# EAGLE board RHD2132_headstage_accel (EAGLE 6.2)
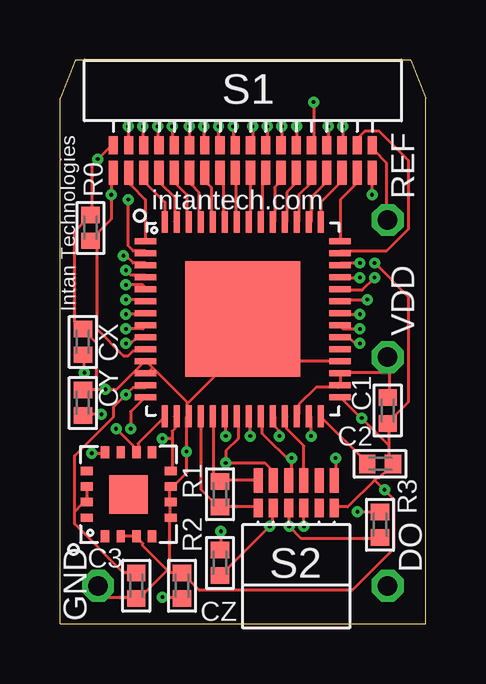
[diagram p0: board, top side]
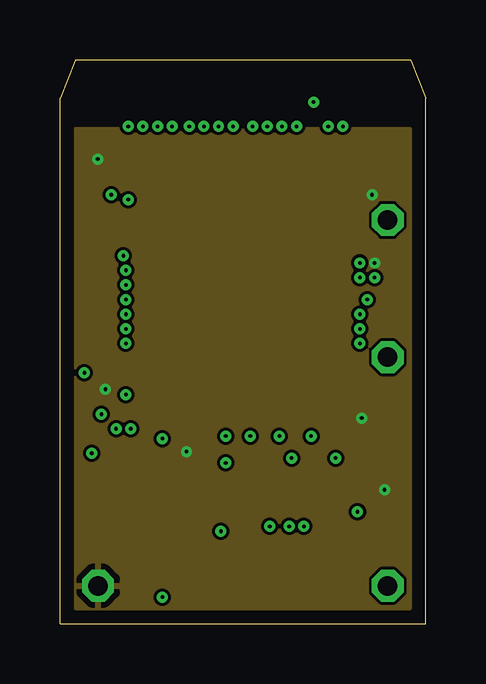
[diagram p1: board, inner layer Route2]
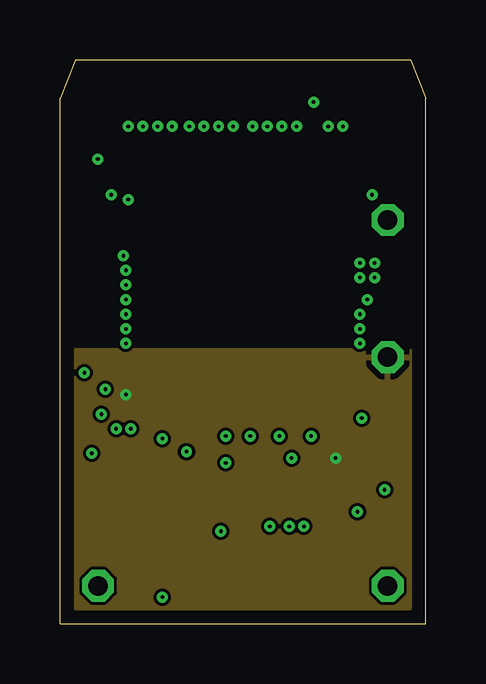
[diagram p2: board, inner layer Route3]
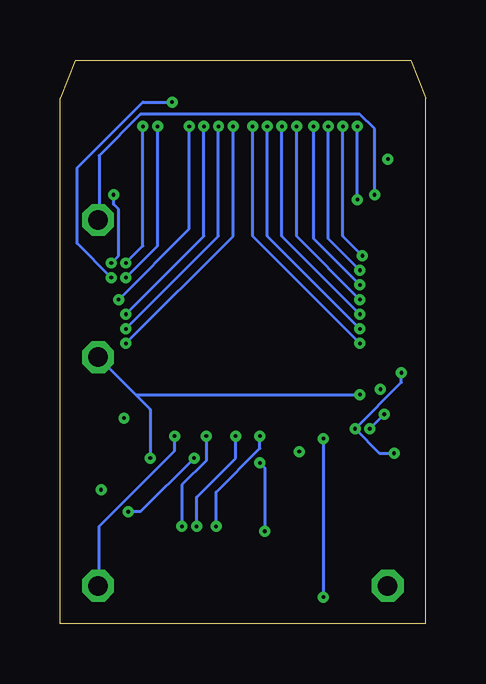
[diagram p3: board, bottom side, seen from below]

Size 15.24 x 23.5 mm. Coordinates in mm from the lower left corner, seen from the top.
Outline: 0,0 0,21.91 0.64,23.5 14.61,23.5 15.24,21.91 15.24,0 0,0
Copper layers (1*2+3*16): Top 0.035mm / dielectric 1.5mm / Route2 0.035mm / dielectric 0.15mm / Route3 0.035mm / dielectric 0.2mm / Bottom 0.035mm
Design rules: minimum track width 5mil, minimum drill 6mil, track to track 5mil, track to pad 5mil, pad to pad 5mil, via to via 5mil, smd to smd 5mil, copper to edge 15mil, drill to drill 15mil, minimum pad ring 10mil, minimum via ring 6mil, stop-mask expansion 4mil, vias tented up to drill 0mil, thermal gap 10mil
Net classes: 1 thick: width 1.016 mm; 2 power: width 0.61 mm

## Footprints (pad centres in the part's own frame; a part is rotated, then mirrored left to right if it is on the bottom)
0402 = smd 0.686 x 0.762: 1 -0.533,0; 2 0.533,0
TESTPOINT_SMALL = drill 0.813 octagon: 1 0,0
OMNETICS_A79025 = smd 0.381 x 0.762: B1 -5.397,-1.016; B2 -4.763,-1.016; B3 -4.128,-1.016; B4 -3.493,-1.016; B5 -2.857,-1.016; B6 -2.223,-1.016; B7 -1.587,-1.016; B8 -0.953,-1.016; B9 -0.318,-1.016; B10 0.318,-1.016; B11 0.953,-1.016; B12 1.587,-1.016; B13 2.223,-1.016; B14 2.857,-1.016; B15 3.493,-1.016; B16 4.128,-1.016; B17 4.763,-1.016; B18 5.397,-1.016 | smd 0.381 x 1.016: T1 -5.397,-2.159; T2 -4.763,-2.159; T3 -4.128,-2.159; T4 -3.493,-2.159; T5 -2.857,-2.159; T6 -2.223,-2.159; T7 -1.587,-2.159; T8 -0.953,-2.159; T9 -0.318,-2.159; T10 0.318,-2.159; T11 0.953,-2.159; T12 1.587,-2.159; T13 2.223,-2.159; T14 2.857,-2.159; T15 3.493,-2.159; T16 4.128,-2.159; T17 4.763,-2.159; T18 5.397,-2.159
OMNETICS_PZN-12-AA = smd 0.381 x 0.762: B1 1.587,-1.016; B2 0.953,-1.016; B3 0.318,-1.016; B4 -0.318,-1.016; B5 -0.953,-1.016; B6 -1.587,-1.016 | smd 0.381 x 1.016: T1 1.587,-2.159; T2 0.953,-2.159; T3 0.318,-2.159; T4 -0.318,-2.159; T5 -0.953,-2.159; T6 -1.587,-2.159
QFN56_8_X_8_LARGE = smd 0.9 x 0.25: 1 -4.05,3.25; 2 -4.05,2.75; 3 -4.05,2.25; 4 -4.05,1.75; 5 -4.05,1.25; 6 -4.05,0.75; 7 -4.05,0.25; 8 -4.05,-0.25; 9 -4.05,-0.75; 10 -4.05,-1.25; 11 -4.05,-1.75; 12 -4.05,-2.25; 13 -4.05,-2.75; 14 -4.05,-3.25; 29 4.05,-3.25; 30 4.05,-2.75; 31 4.05,-2.25; 32 4.05,-1.75; 33 4.05,-1.25; 34 4.05,-0.75; 35 4.05,-0.25; 36 4.05,0.25; 37 4.05,0.75; 38 4.05,1.25; 39 4.05,1.75; 40 4.05,2.25; 41 4.05,2.75; 42 4.05,3.25 | smd 0.25 x 0.9: 15 -3.25,-4.05; 16 -2.75,-4.05; 17 -2.25,-4.05; 18 -1.75,-4.05; 19 -1.25,-4.05; 20 -0.75,-4.05; 21 -0.25,-4.05; 22 0.25,-4.05; 23 0.75,-4.05; 24 1.25,-4.05; 25 1.75,-4.05; 26 2.25,-4.05; 27 2.75,-4.05; 28 3.25,-4.05; 43 3.25,4.05; 44 2.75,4.05; 45 2.25,4.05; 46 1.75,4.05; 47 1.25,4.05; 48 0.75,4.05; 49 0.25,4.05; 50 -0.25,4.05; 51 -0.75,4.05; 52 -1.25,4.05; 53 -1.75,4.05; 54 -2.25,4.05; 55 -2.75,4.05; 56 -3.25,4.05 | smd 4.8 x 4.8: CENTER 0,0
ADXL335 = smd 0.5 x 0.35: 1 -1.75,0.975; 2 -1.75,0.325; 3 -1.75,-0.325; 4 -1.75,-0.975; 9 1.75,-0.975; 10 1.75,-0.325; 11 1.75,0.325; 12 1.75,0.975 | smd 0.35 x 0.5: 5 -0.975,-1.75; 6 -0.325,-1.75; 7 0.325,-1.75; 8 0.975,-1.75; 13 0.975,1.75; 14 0.325,1.75; 15 -0.325,1.75; 16 -0.975,1.75 | smd 1.6 x 1.6: CENTER 0,0

## Placement (x,y rotation side)
C1  100n  [0402]  13.65,8.89 270 top
C2  10n  [0402]  13.34,6.67 0 top
C3  100n  [0402]  3.17,1.59 270 top
CX  27n  [0402]  0.95,11.75 90 top
CY  27n  [0402]  0.95,9.21 90 top
CZ  27n  [0402]  5.08,1.59 90 top
DO  TESTPOINT_SMALL  [TESTPOINT_SMALL]  13.65,1.59 0 top
GND  TESTPOINT_SMALL  [TESTPOINT_SMALL]  1.59,1.59 0 top
R0  0  [0402]  1.27,16.5 270 top
R1  100  [0402]  6.67,5.4 90 top
R2  100  [0402]  6.67,2.54 90 top
R3  100  [0402]  13.34,4.13 90 top
REF  TESTPOINT_SMALL  [TESTPOINT_SMALL]  13.65,16.83 90 top
S1  OMNETICS_A79025  [OMNETICS_A79025]  7.62,20.95 0 top
S2  RHD2000-CABLE-AMP-SIDE  [OMNETICS_PZN-12-AA]  9.84,3.81 180 top
U1  RHD2132_QFN  [QFN56_8_X_8_LARGE]  7.62,12.7 0 top
U2  ADXL335  [ADXL335]  2.86,5.4 90 top
VDD  TESTPOINT_SMALL  [TESTPOINT_SMALL]  13.65,11.11 0 top

## Library data of the parts
C1-C3 CX CY CZ DO GND R0 R1-R3 REF VDD = RHD2000_eval_board
S1 S2 U1 = RHD2000
U2 = harrison

## Nets
GND: C1.2 C2.2 C3.2 CX.2 CY.2 CZ.2 GND.1 R0.1 S1.B1 S1.T18 S2.B6 U1.11 U1.12 U1.17 U1.29 U1.32 U1.CENTER U2.2 U2.3 U2.5 U2.6 U2.7
N$1: R0.2 REF.1 S1.B18 S1.T1 U1.10
N$2: S1.B3 U1.3
N$3: S1.B2 U1.2
N$4: S1.B4 U1.4
N$5: S1.B5 U1.5
N$6: S1.B6 U1.6
N$7: S1.B7 U1.7
N$8: S1.B8 U1.8
N$9: S1.B9 U1.9
N$10: S1.B10 U1.34
N$11: R1.1 S2.B1 U1.18
N$12: S1.B17 U1.41
N$13: S1.B16 U1.40
N$14: S1.B15 U1.39
N$15: S1.B14 U1.38
N$16: S1.B13 U1.37
N$17: S1.B12 U1.36
N$18: S1.B11 U1.35
N$19: S1.T9 U1.50
N$20: S1.T8 U1.51
N$21: S1.T7 U1.52
N$22: S1.T3 U1.56
N$23: S1.T4 U1.55
N$24: S1.T5 U1.54
N$25: S1.T6 U1.53
N$26: S1.T10 U1.49
N$27: S1.T11 U1.48
N$28: S1.T12 U1.47
N$29: S1.T13 U1.46
N$30: S1.T14 U1.45
N$31: S1.T15 U1.44
N$32: S1.T16 U1.43
N$33: S1.T2 U1.1
N$34: S1.T17 U1.42
N$35: R1.2 S2.T1 U1.19
N$36: R2.1 S2.B2 U1.20
N$37: R2.2 S2.T2 U1.21
N$38: R3.1 S2.B3 U1.22
N$39: R3.2 S2.T3 U1.23
N$40: S2.B4 U1.24
N$41: S2.T4 U1.25
N$42: C2.1 U1.28
N$43: DO.1 U1.27
VCC: C1.1 C3.1 S2.T6 U1.13 U1.26 U1.30 U1.31 U2.14 U2.15 VDD.1
XOUT: CX.1 U1.14 U2.12
YOUT: CY.1 U1.15 U2.10
ZOUT: CZ.1 U1.16 U2.8

## Tracks (layer width: path | path; a pad name or v marks a point on that pad's centre or on a via)
GND  (via drill 0.15)
  Top 0.127: 8.23,12.09 9.35,10.97 11.58,10.97 U1.32 | S1.B1 2.13,19.91 1.32,19.1 1.32,17.07 R0.1 1.22,16.97 0.61,16.36 0.61,12.6 0.91,12.29 CX.2 1.02,12.19 1.52,11.68 1.52,9.75 | 1.52,9.75 2.34,9.75 3.56,10.97 U1.11 3.66,10.87 3.86,10.67 | 1.52,9.75 1.02,9.75 CY.2 | 5.28,9.14 5.28,9.25 3.86,10.67 | 5.28,9.14 5.28,8.74 U1.17 5.28,8.64 5.28,6.3 4.67,5.69 U2.7 4.57,5.69 4.57,5.08 U2.6 4.57,4.98 4.57,4.47 U2.5 4.57,4.37 4.57,2.13 | 3.86,10.67 3.66,10.46 U1.12 | 5.28,9.14 8.23,12.09 | 8.23,12.09 U1.CENTER | 13.11,5.99 13.21,6.1 13.31,6.1 13.72,6.5 | 13.11,5.99 11.99,4.88 11.48,4.88 S2.B6 | 13.72,6.5 13.82,6.6 C2.2 13.72,6.5 | 13.72,6.5 13.72,7.42 | 13.72,7.42 13.72,8.33 C1.2 13.72,8.43 14.53,9.25 14.53,13.61 v13.11,15.04 | 13.72,7.42 11.68,9.45 U1.29 | U2.2 3.15,3.66 U2.3 3.25,3.56 3.45,3.35 3.45,3.25 4.47,2.23 | 4.57,2.13 4.47,2.23 | 5.08,2.13 4.57,2.13 | GND.1 1.63,1.52 2.03,1.12 3.15,1.12 C3.2 3.25,1.02 4.47,2.23 | 13.11,5.99 13.92,5.18 13.92,3.15 12.19,1.42 5.79,1.42 5.08,2.13 | 5.08,2.13 CZ.2 | v13.01,17.88 13.01,18.8 S1.T18
  Bottom 0.127: v13.01,17.88 13.01,17.48 12.8,17.27 12.8,15.34 v13.11,15.04
  other vias: 12.57,8.57 13.53,5.59 5.27,7.18 1.57,19.37 1.89,9.78
  pour Route2: 0.64,0.64 14.61,0.64 14.61,20.64 0.64,20.64
N$1  (via drill 0.15)
  Top 0.127: S1.B18 13.11,19.91 13.11,19.71 13.61,19.2 13.61,16.87 REF.1 | 1.52,16.26 2.13,16.87 v2.13,17.88 2.13,18.8 S1.T1 | 1.52,16.26 1.32,16.05 R0.2 1.52,16.26 | 1.52,16.26 1.52,12.29 2.64,11.18 2.85,11.18 3.05,11.38 3.56,11.38 U1.10
  Bottom 0.127: v2.13,17.88 2.13,20.62 2.74,21.23 11.89,21.23 13.61,19.51 13.61,16.87 REF.1
N$2  (via drill 0.15)
  Top 0.127: v3.45,20.73 3.45,20.02 S1.B3 | v2.64,15.34 2.74,15.34 3.05,15.04 3.56,15.04 U1.3
  Bottom 0.127: v3.45,20.73 3.45,16.15 v2.64,15.34
N$3  (via drill 0.15)
  Top 0.127: v2.85,20.73 2.85,20.02 S1.B2 | v2.85,17.68 2.85,15.75 3.05,15.54 3.56,15.54 U1.2
  Bottom 0.127: v2.85,17.68 v2.85,20.73
N$4  (via drill 0.15)
  Top 0.127: v4.06,20.73 4.06,20.02 S1.B4 | v2.74,14.73 2.95,14.53 3.56,14.53 U1.4
  Bottom 0.127: v4.06,20.73 4.06,16.05 v2.74,14.73
N$5  (via drill 0.15)
  Top 0.127: v4.67,20.73 4.67,20.02 S1.B5 | v2.74,14.12 3.45,14.12 3.56,14.02 U1.5
  Bottom 0.127: v4.67,20.73 4.67,16.05 v2.74,14.12
N$6  (via drill 0.15)
  Top 0.127: v5.38,20.73 5.38,20.02 S1.B6 | v2.74,13.51 3.56,13.51 U1.6
  Bottom 0.127: v5.38,20.73 5.38,16.15 v2.74,13.51
N$7  (via drill 0.15)
  Top 0.127: v5.99,20.73 5.99,20.02 S1.B7 | v2.74,12.9 3.56,12.9 U1.7
  Bottom 0.127: v5.99,20.73 5.99,16.15 v2.74,12.9
N$8  (via drill 0.15)
  Top 0.127: v6.6,20.73 6.6,20.02 S1.B8 | v2.74,12.29 3.45,12.29 3.56,12.39 U1.8
  Bottom 0.127: v6.6,20.73 6.6,16.15 v2.74,12.29
N$9  (via drill 0.15)
  Top 0.127: v7.21,20.73 7.21,20.02 S1.B9 | v2.74,11.68 2.95,11.68 3.15,11.89 3.56,11.89 U1.9
  Bottom 0.127: v7.21,20.73 7.21,16.15 v2.74,11.68
N$10  (via drill 0.15)
  Top 0.127: v8.03,20.73 8.03,20.02 S1.B10 | v12.5,11.68 12.29,11.68 12.09,11.89 11.68,11.89 U1.34
  Bottom 0.127: v8.03,20.73 8.03,16.15 v12.5,11.68
N$11
  Top 0.127: S2.B1 8.23,4.88 6.71,4.88 R1.1 6.6,4.88 5.89,5.59 5.89,8.64 U1.18
N$12
  Top 0.127: S1.B17 12.39,20.02 12.39,20.22 12.7,20.52 13.31,20.52 14.53,19.3 14.53,16.46 13.61,15.54 11.68,15.54 U1.41
N$13  (via drill 0.15)
  Top 0.127: v11.79,20.73 11.79,20.02 S1.B16 | v12.5,15.04 11.68,15.04 U1.40
  Bottom 0.127: v11.79,20.73 11.79,15.75 v12.5,15.04
N$14  (via drill 0.15)
  Top 0.127: v11.18,20.73 11.18,20.02 S1.B15 | v12.5,14.43 11.68,14.43 U1.39
  Bottom 0.127: v11.18,20.73 11.18,15.75 v12.5,14.43
N$15  (via drill 0.15)
  Top 0.127: v10.57,21.74 10.57,20.02 S1.B14 | v13.11,14.43 12.6,13.92 11.68,13.92 U1.38
  Bottom 0.127: v10.57,21.74 11.79,21.74 14.53,19 14.53,15.85 v13.11,14.43
N$16  (via drill 0.15)
  Top 0.127: v9.86,20.73 9.86,20.02 S1.B13 | v12.8,13.51 11.68,13.51 U1.37
  Bottom 0.127: v9.86,20.73 9.86,16.46 v12.8,13.51
N$17  (via drill 0.15)
  Top 0.127: v9.25,20.73 9.25,20.02 S1.B12 | v12.5,12.9 11.68,12.9 U1.36
  Bottom 0.127: v9.25,20.73 9.25,16.15 v12.5,12.9
N$18  (via drill 0.15)
  Top 0.127: v8.64,20.73 8.64,20.02 S1.B11 | v12.5,12.29 11.79,12.29 11.68,12.39 U1.35
  Bottom 0.127: v8.64,20.73 8.64,16.15 v12.5,12.29
N$19
  Top 0.127: U1.50 7.32,16.76 7.32,18.8 S1.T9
N$20
  Top 0.127: U1.51 6.81,16.76 6.81,18.69 6.71,18.8 S1.T8
N$21
  Top 0.127: U1.52 6.3,16.76 6.3,18.19 6.1,18.39 6.1,18.8 S1.T7
N$22
  Top 0.127: U1.56 4.37,16.76 4.37,17.58 3.56,18.39 3.56,18.8 S1.T3
N$23
  Top 0.127: U1.55 4.78,16.76 4.78,17.78 4.17,18.39 4.17,18.8 S1.T4
N$24
  Top 0.127: U1.54 5.28,16.76 5.28,17.88 4.78,18.39 4.78,18.8 S1.T5
N$25
  Top 0.127: U1.53 5.79,16.76 5.79,17.98 5.49,18.29 5.49,18.8 S1.T6
N$26
  Top 0.127: U1.49 7.92,16.76 7.92,18.8 S1.T10
N$27
  Top 0.127: U1.48 8.43,16.76 8.43,18.69 8.53,18.8 S1.T11
N$28
  Top 0.127: U1.47 8.94,16.76 8.94,18.19 9.14,18.39 9.14,18.8 S1.T12
N$29
  Top 0.127: U1.46 9.45,16.76 9.45,17.98 9.75,18.29 9.75,18.8 S1.T13
N$30
  Top 0.127: U1.45 9.96,16.76 9.96,17.88 10.46,18.39 10.46,18.8 S1.T14
N$31
  Top 0.127: U1.44 10.46,16.76 10.46,17.78 11.07,18.39 11.07,18.8 S1.T15
N$32
  Top 0.127: U1.43 10.87,16.76 10.87,17.58 11.68,18.39 11.68,18.8 S1.T16
N$33
  Top 0.127: U1.1 3.56,15.95 3.56,17.68 2.95,18.29 2.95,18.8 S1.T2
N$34
  Top 0.127: U1.42 11.68,15.95 11.68,17.68 12.29,18.29 12.29,18.8 S1.T17
N$35
  Top 0.127: S2.T1 8.23,5.99 6.71,5.99 R1.2 6.4,6.2 6.4,8.64 U1.19
N$36  (via drill 0.15)
  Top 0.127: R2.1 6.71,2.03 v8.74,4.06 8.84,4.17 8.84,4.78 S2.B2 | v6.91,7.82 6.91,8.64 U1.20
  Bottom 0.127: v6.91,7.82 6.91,7.32 8.74,5.49 v8.74,4.06
N$37  (via drill 0.15)
  Top 0.127: v6.71,3.86 6.71,3.15 R2.2 | U1.21 7.42,8.64 7.42,7.72 6.91,7.21 v6.91,6.71 8.53,6.71 8.84,6.4 8.84,5.99 S2.T2
  Bottom 0.127: v6.71,3.86 6.71,6.5 v6.91,6.71
N$38  (via drill 0.15)
  Top 0.127: S2.B3 9.55,4.78 v9.55,4.06 10.06,3.56 13.31,3.56 R3.1 | v7.92,7.82 7.92,8.64 U1.22
  Bottom 0.127: v7.92,7.82 7.92,6.91 9.55,5.28 v9.55,4.06
N$39  (via drill 0.15)
  Top 0.127: v12.39,4.67 13.31,4.67 R3.2 | 9.65,6.71 9.65,6.1 S2.T3 | 9.65,6.71 8.43,7.92 8.43,8.64 U1.23 | 9.65,6.71 v9.65,6.91
  Bottom 0.127: v12.39,4.67 11.89,4.67 v9.65,6.91
N$40  (via drill 0.15)
  Top 0.127: v10.16,4.06 S2.B4 | v9.14,7.82 9.14,8.03 8.94,8.23 8.94,8.64 U1.24
  Bottom 0.127: v10.16,4.06 10.16,5.79 9.14,6.81 v9.14,7.82
N$41
  Top 0.127: S2.T4 10.16,7.42 9.45,8.13 9.45,8.64 U1.25
N$42
  Top 0.127: C2.1 12.8,6.71 10.87,8.64 U1.28
N$43  (via drill 0.15)
  Top 0.127: v10.46,7.82 10.46,8.64 U1.27
  Bottom 0.127: v10.46,7.82 10.46,7.21 13.61,4.06 13.61,1.63 DO.1
VCC  (via drill 0.15)
  Top 0.127: U2.14 1.12,5.69 U2.15 1.02,4.98 0.91,4.98 0.61,4.67 | 0.61,4.67 0.61,4.17 2.64,2.13 3.15,2.13 C3.1 | 0.61,4.67 0.61,7.01 2.23,8.64 2.23,9.04 v2.74,9.55 3.05,9.86 3.56,9.86 U1.13 | U1.26 9.96,8.74 9.96,9.14 10.67,9.86 11.58,9.86 U1.30 11.68,9.96 11.68,10.36 U1.31 11.68,10.46 13.72,10.46 | 13.72,10.46 13.72,11.07 VDD.1 13.72,10.46 | 13.72,10.46 13.72,9.45 C1.1 | v11.48,6.91 11.48,5.99 S2.T6
  Bottom 0.127: v11.48,6.91 11.48,8.94 12.09,9.55 | VDD.1 12.09,9.55 | 12.09,9.55 v2.74,9.55
  pour Route3: 0.64,0.64 14.61,0.64 14.61,11.43 0.64,11.43
XOUT  (via drill 0.15)
  Top 0.127: v1.32,7.11 1.83,7.11 U2.12 | v2.95,8.13 2.95,8.84 3.56,9.45 U1.14 | v1.02,10.46 1.02,11.18 CX.1
  Bottom 0.127: v1.32,7.11 1.93,7.11 v2.95,8.13 1.02,10.06 v1.02,10.46
YOUT  (via drill 0.15)
  Top 0.127: 3.25,7.21 3.25,7.52 4.37,8.64 U1.15 | v1.73,8.74 1.02,8.74 CY.1 | 3.25,7.21 v2.34,8.13 | 3.25,7.21 U2.10
  Bottom 0.127: v2.34,8.13 v1.73,8.74
ZOUT  (via drill 0.15)
  Top 0.127: 4.67,7.72 4.67,8.03 4.78,8.13 4.78,8.64 U1.16 | 4.67,7.72 4.67,6.4 U2.8 | v4.27,1.12 5.08,1.12 CZ.1 | 4.67,7.72 v4.27,7.72
  Bottom 0.127: v4.27,7.72 v4.27,1.12

## Text on the board
tPlace: intantech.com | Intan Technologies